# Altium PCB TankTurret.PcbDoc
Units mm, origin at the board's own origin, x right, y up, seen from the top; angles counter-clockwise.
Board outline 70 x 87 mm, 2 copper layers (TL, BL), stack 0.872 mm thick; 6 components, 4 nets, 19 pads, 2 vias.
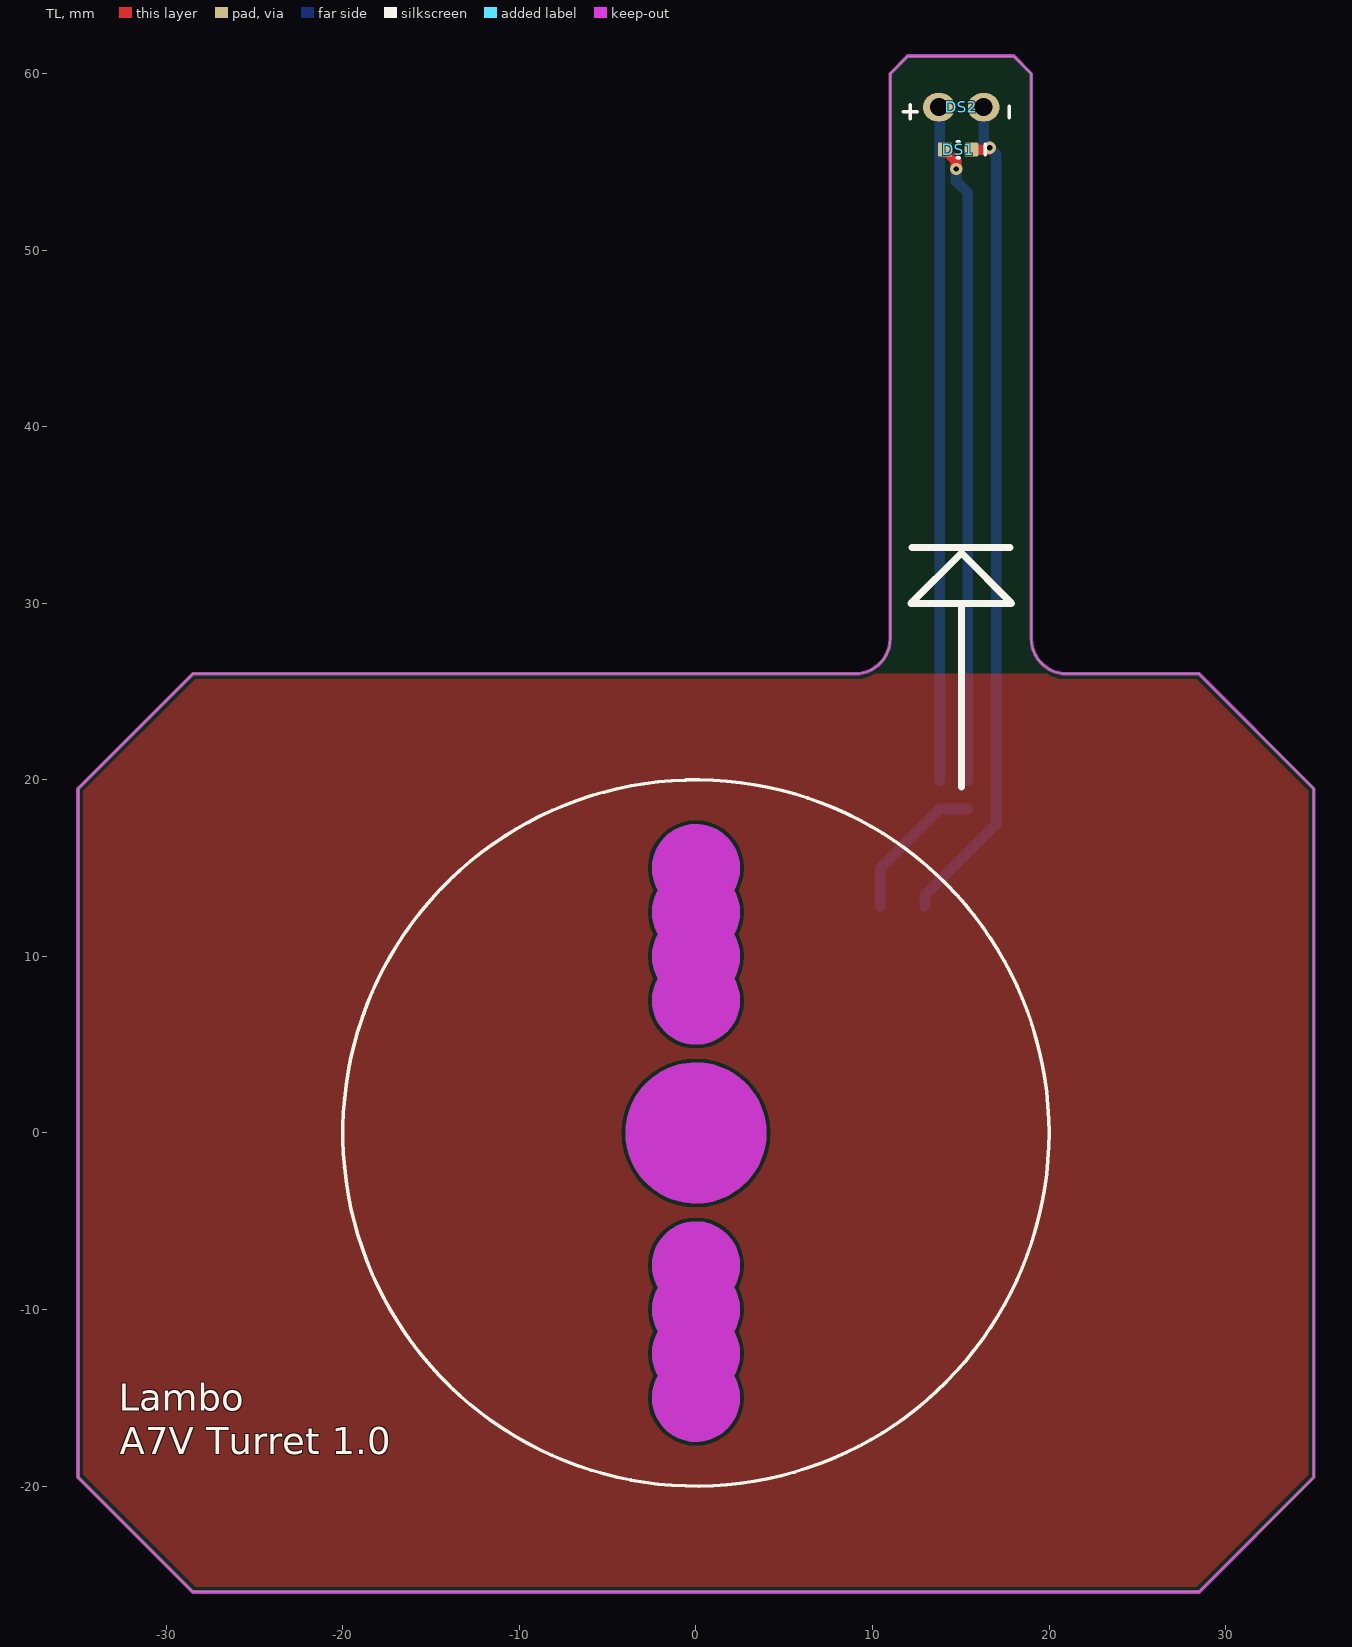
[diagram p0: TL view]
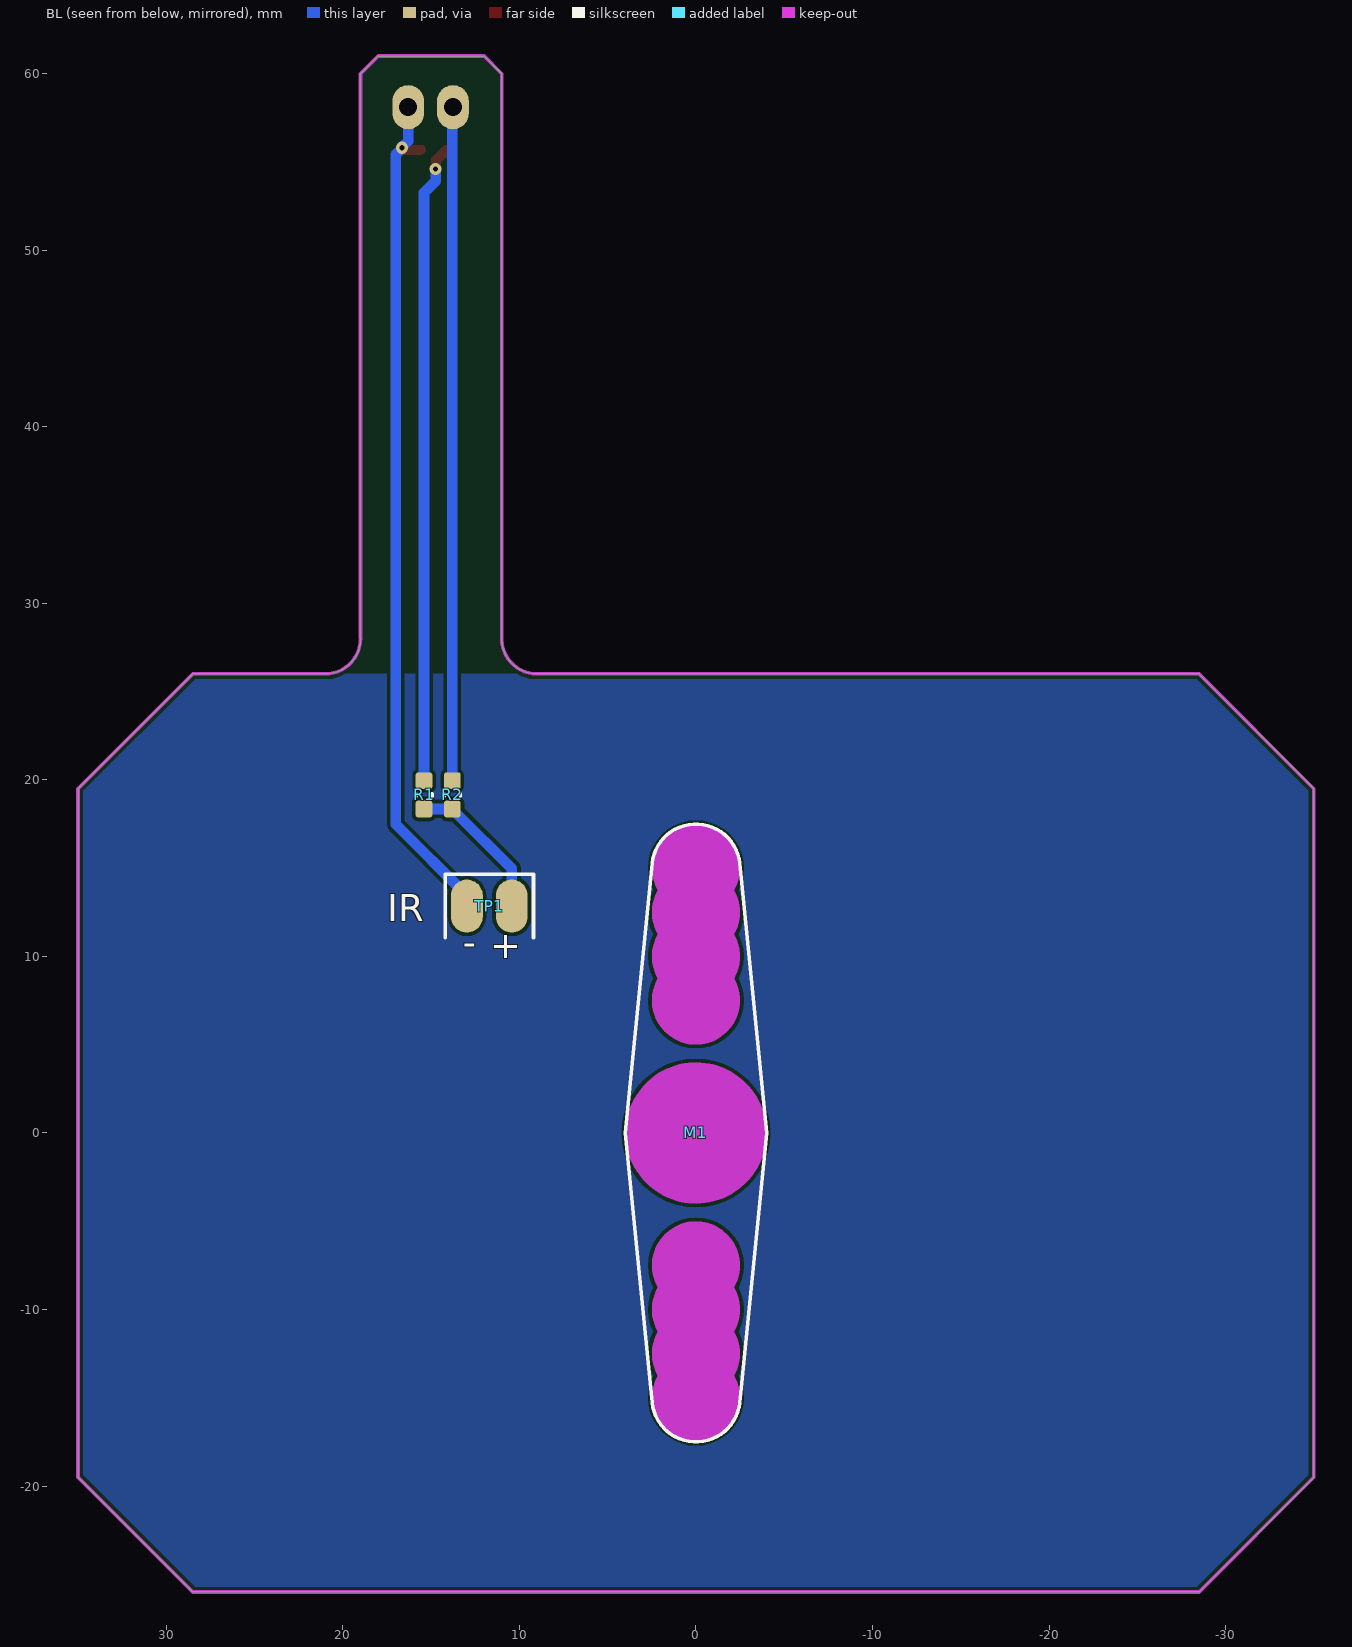
[diagram p1: BL view, seen from below]

## Layer stack, top to bottom
Top Solder: solder mask 0.01, Solder Resist, Dk 3.5
TL: signal copper 0.036
Dielectric 4: prepreg 0.8, FR-4, Dk 4.2
BL: signal copper 0.036
Bottom Solder: solder mask 0.01, Solder Resist, Dk 3.5

## Board outline
-35,-19.5 -28.5,-26 28.5,-26 35,-19.5 35,19.5 28.5,26 20.998,26 cw(c20.998,28) 18.998,28 19,28 19,60 18,61 12,61 11,60 11,28 11.002,28 cw(c9.002,28) 9.002,26 -28.5,26 -35,19.5

## Design rules (kind name [scope] priority, off if disabled: settings)
Clearance Clearance_LIS2 [HasFootprint('PQFN35P200X200X100-14N')] p1: gap=0.2 ignorepadtopadclearanceinfootprint=TRUE except(0: Arc-Hole Track-Hole SMDPad-Hole THPad-Hole Via-Hole Fill-Hole Poly-Hole Region-Hole Text-Hole; 0.1: Arc-Arc Arc-Track Arc-SMDPad Track-Track Track-SMDPad SMDPad-SMDPad)
Clearance [All] p2: gap=0.2 ignorepadtopadclearanceinfootprint=TRUE except(0: Arc-Hole Track-Hole SMDPad-Hole THPad-Hole Via-Hole Fill-Hole Poly-Hole Region-Hole Text-Hole)
DiffPairsRouting DiffPairsRouting_1 [InDifferentialPair('D')] p1: maxlimit=0.4 minlimit=0.2 mostfreqgap=0.2 toplayer_minwidth=0.2 toplayer_maxwidth=0.4 toplayer_prefwidth=0.4 bottomlayer_minwidth=0.2 bottomlayer_maxwidth=0.4 bottomlayer_prefwidth=0.4 maxuncoupledlength=12.7
DiffPairsRouting [All] p2: maxlimit=0.254 minlimit=0.254 mostfreqgap=0.254 toplayer_minwidth=0.381 toplayer_maxwidth=0.381 toplayer_prefwidth=0.381 bottomlayer_minwidth=0.381 bottomlayer_maxwidth=0.381 bottomlayer_prefwidth=0.381 maxuncoupledlength=12.7
HoleSize [All] p1: absolutevalues=TRUE maxlimit=10 minlimit=0.3 maxpercent=80.000 minpercent=20.000
MinimumSolderMaskSliver MinimumSolderMaskSliver_1 [HasFootprint('TSQFP50P900X900X160-48N_48LQFP')] p1: minsoldermaskwidth=0.08
MinimumSolderMaskSliver [All] p2: minsoldermaskwidth=0.05
PolygonConnect [All] p1: thpad.connectstyle=Relief thpad.reliefconductorwidth=0.4 thpad.reliefentries=4 thpad.polygonreliefangle="90 Angle" thpad.airgapwidth=0.254 smdpad.connectstyle=Direct smdpad.reliefconductorwidth=0.254 smdpad.reliefentries=4 smdpad.polygonreliefangle="90 Angle" smdpad.airgapwidth=0.254 via.connectstyle=Direct via.reliefconductorwidth=0.254 via.reliefentries=4 via.polygonreliefangle="90 Angle" via.airgapwidth=0.254
RoutingVias [All] p1: holewidth=0.3 width=0.7 viastyle="Through Hole" minholewidth=0.3 minwidth=0.5 maxholewidth=1 maxwidth=2
SilkToSilkClearance [All] p1: silktosilkclearance=0
SilkToSolderMaskClearance [IsPad] p1: minsilkscreentomaskgap=0.1 clearancetoexposedcopper=TRUE
SolderMaskExpansion [All] p1: expansion=0.102 istentingtop=FALSE
Width [All] p1: maxlimit=10 minlimit=0.15 preferedwidth=0.254 minimp=50.000000 maximp=50.000000 favimp=50.000000
25 further rules are at their usual default settings.

## Components (designator, comment, footprint, x,y, rotation, side; value= is the part's Value field where it differs from the comment)
DS1 "GRN-0603" LED_SML-LX0603 14.85,55.7 r180 top
DS2 "SFH 4546" P375-504 15.03,60.6 r0 top
M1 "ServoHorn" SERVO_HORN 0,0 r270 bottom
R1 "470R,1%" RESC1608X06N_0603 15.4,19.15 r270 bottom
R2 "470R,1%" RESC1608X06N_0603 13.8,19.15 r270 bottom
TP1 "Pads-N2" PADS-N2 11.7,12.85 r90 bottom

## Footprints (in the part's own frame and the unit in brackets; to place one, negate y for a bottom-side part, rotate by r counter-clockwise, add the part's x,y. Pads: shape width x height; smd on the part's side, far side on the other; paste and mask are expansions set on the pad)
LED_SML-LX0603 [mm] "Chip led, 2-Leads, Body 1.6x0.8mm, IPC Medium Density"
  rrect25% 0.8x0.8 smd: 1(-0.75,0) 2(0.75,0)
  silkscreen extent -1.55,-0.45 0.05,0.45, body extent -0.8,-0.4 0.8,0.4, height 0.63
P375-504 [mm] "2-pin 5mm dia  thru-hole 2.54mm pitch straight"
  oval 1.8x1.6 / inner oval 1.8x1.6 / far side oval 1.8x2.5 hole 1.016: 1(1.27,-2.5) 2(-1.27,-2.5)
  silkscreen extent -3.3,-3.15 -2.5,-2.35, body extent -2.93,-2.75 2.47,9.34, height 3.2
PADS-N2 [mm]
  oval 3x1.8 smd paste-2: 1(0,1.27) 2(0,-1.27)
  silkscreen extent -1.8,-2.5 1.8,2.5
RESC1608X06N_0603 [mm] "Chip Resistor, 2-Leads, Body 1.6x0.8mm, IPC Medium Density"
  rrect32% 0.95x0.95 smd: 1(-0.8,0) 2(0.8,0)
  silkscreen extent -0.08,-0.45 0.08,0.45, body extent -0.78,-0.4 0.82,0.4, height 0.4
SERVO_HORN [mm]
  round 0 hole 1 unplated: 1(-15,0) 1(-12.5,0) 1(-10,0) 1(-7.5,0) 1(7.5,0) 1(10,0) 1(12.5,0) 1(15,0)
  round 0 hole 5 unplated: 1(0,0)
  Keep-Out Layer circle w2.5: c-15,0 r1.25
  Keep-Out Layer circle w2.5: c-12.5,0 r1.25
  Keep-Out Layer circle w2.5: c-10,0 r1.25
  Keep-Out Layer circle w2.5: c-7.5,0 r1.25
  Keep-Out Layer circle w2.5: c7.5,0 r1.25
  Keep-Out Layer circle w2.5: c10,0 r1.25
  Keep-Out Layer circle w2.5: c12.5,0 r1.25
  Keep-Out Layer circle w2.5: c15,0 r1.25
  Keep-Out Layer circle w4: c0,0 r2
  silkscreen extent -17.5,-4 17.5,4

## Part data
DS1: library part LED-10087-A, "LED GREEN CLEAR 0603 SMD", Colour=GREEN, Manufacturer=Dialight, Manufacturer Part Number=5988081107F, Supplier Part Number 1=350-2036-1-ND, Axial Intensity=300mcd, BWA PN=LED-10087-A, Display_Name=GRN-0603, If(max)=20mA, Lens Style/Size=0603, Lens type=clear, Schematic Symbol=LED_1, Supplier 1=Digi-Key, Vf@I=3.2V, Viewing Angle=140, Vr(max)=-, Wavelength=523nm
DS2: library part LED-10072-A, "EMITTER IR 940NM 100MA RADIAL", Colour=IR, Manufacturer=Osram, Supplier Part Number 1=475-2870-ND, Axial Intensity="130 mw/sr@100mA", BWA PN=LED-10072-A, Display_Name="SFH 4546", If(max)=100mA, Lens Style/Size="T-1 3/4 5mm RA", Lens type=Black, Manufacturer Part Number="SFH 4546", Schematic Symbol=LED_1, Supplier 1=Digi-Key, Vf@I=1.5V, Viewing Angle=+/-20°, Vr(max)=5V, Wavelength=940nm
R1 R2: library part RSH-470R0-D, "RES 470 OHM 1/10W 1% 0603 SMD", Manufacturer="Rohm Semiconductor", Manufacturer Part Number=MCR03EZPFX4700, Power=0.1W, Resistance=470R, Supplier Part Number 1=RHM470HCT-ND, Tolerance=1%, BWA PN=RSH-470R0-D, Display_Name=470R,1%, Schematic Symbol=RESISTOR_1, Supplier 1=Digi-Key, Type=Chip

## Via types
v1: diameter 0.7, hole 0.3, TL to BL, tented both sides, 2 vias

## Nets (pads, with @x,y where several pads share a name; then routed paths per layer and width w, separated by ;. In a path a pad name is that pad's centre, name@x,y a point inside that pad or via, vN(x,y) a via of type N, cw(c..) or ccw(c..) an arc to the next point about the centre after c; other vN are vias at no path point)
GND: DS1.1 DS2.1 TP1.1 | length 48.7
  TL w0.6: DS1.1 16.55,55.7 v1(16.65,55.8)
  BL w0.6: TP1.1 12.97,13.45 17,17.48 17,55.423 16.669,55.754 v1@16.669,55.819 ; DS2.1@16.3,58.5 16.3,56.181 16.631,55.85 16.631,55.819 v1(16.65,55.8)
NetDS1_2: DS1.2 R1.1 | length 36.3
  TL w0.6: DS1.2 14.731,55.069 14.731,54.619 v1(14.75,54.6)
  BL w0.6: v1(14.75,54.6) 14.731,54.581 14.731,53.919 15.4,53.25 R1.1
NetDS2_2: DS2.2 R2.1 | length 38.5
  BL w0.6: R2.1 DS2.2@13.8,58.46
NetR1_2: R1.2 R2.2 TP1.2 | length 8.5
  BL w0.6: TP1.2 10.43,14.98 13.625,18.175 R2.2 R1.2
pads on no net: M1.1

## Polygon pours and split planes (outlines as drawn)
no net on TL "NONET_L01_P000" (solid, pour order 0): 9,26 21,26 28.5,26 35,19.5 35,-19.5 28.5,-26 -28.5,-26 -35,-19.5 -35,19.5 -28.5,26
no net on BL "NONET_L02_P001" (solid, pour order 1): 9,26 21,26 28.5,26 35,19.5 35,-19.5 28.5,-26 -28.5,-26 -35,-19.5 -35,19.5 -28.5,26

## Keep-outs
Keep-Out Layer:
  lines w0.2: -35,-19.5 -35,19.5 -28.5,26 9,26 ccw(c9,28) 11,28 11,60 12,61 18,61 19,60 19,28 ccw(c21,28) 21,26 28.5,26 35,19.5 35,-19.5 28.5,-26 -28.5,-26 -35,-19.5

## Silkscreen, mask and mechanical layers (free items; w line width, h text height)
Top Overlay:
  circle w0.2: c0,0 r20
  lines w0.2: 17.75,57.5 17.75,58.15
  lines w0.4: 12.234,33.15 17.784,33.15 ; 15.034,19.6 15.034,30 ; 12.184,30 17.884,30 15.034,32.85 12.184,30
  text "Lambo" at -32.696,-15.746 h1.52
  text "A7V Turret 1.0" at -32.646,-18.196 h1.52
Bottom Overlay:
  text "IR" at 17.496,12.004 h1.52
MechOutline (Mech31):
  lines w0.2: 11,28 11,60 12,61 18,61 19,60 19,28 ; 11.002,28 cw(c9.002,28) 9.002,26 -28.5,26 -35,19.5 -35,0 -35,-19.5 -28.5,-26 0,-26 28.5,-26 35,-19.5 35,19.5 28.5,26 20.998,26 cw(c20.998,28) 18.998,28

## Text inside footprints (layer, text, board x,y; h text height)
TP1: Bottom Overlay "-" at 12.454,11.208 h1.52 r180; Bottom Overlay "+" at 9.904,11.2 h1.52 r180